# Altium PCB Carte Emulateur AX12.PcbDoc
Units mm, origin at the board's own origin, x right, y up, seen from the top; angles counter-clockwise.
Board outline 50 x 20 mm, 2 copper layers (Top Layer, Bottom Layer); 24 components, 18 nets, 92 pads, 19 vias.
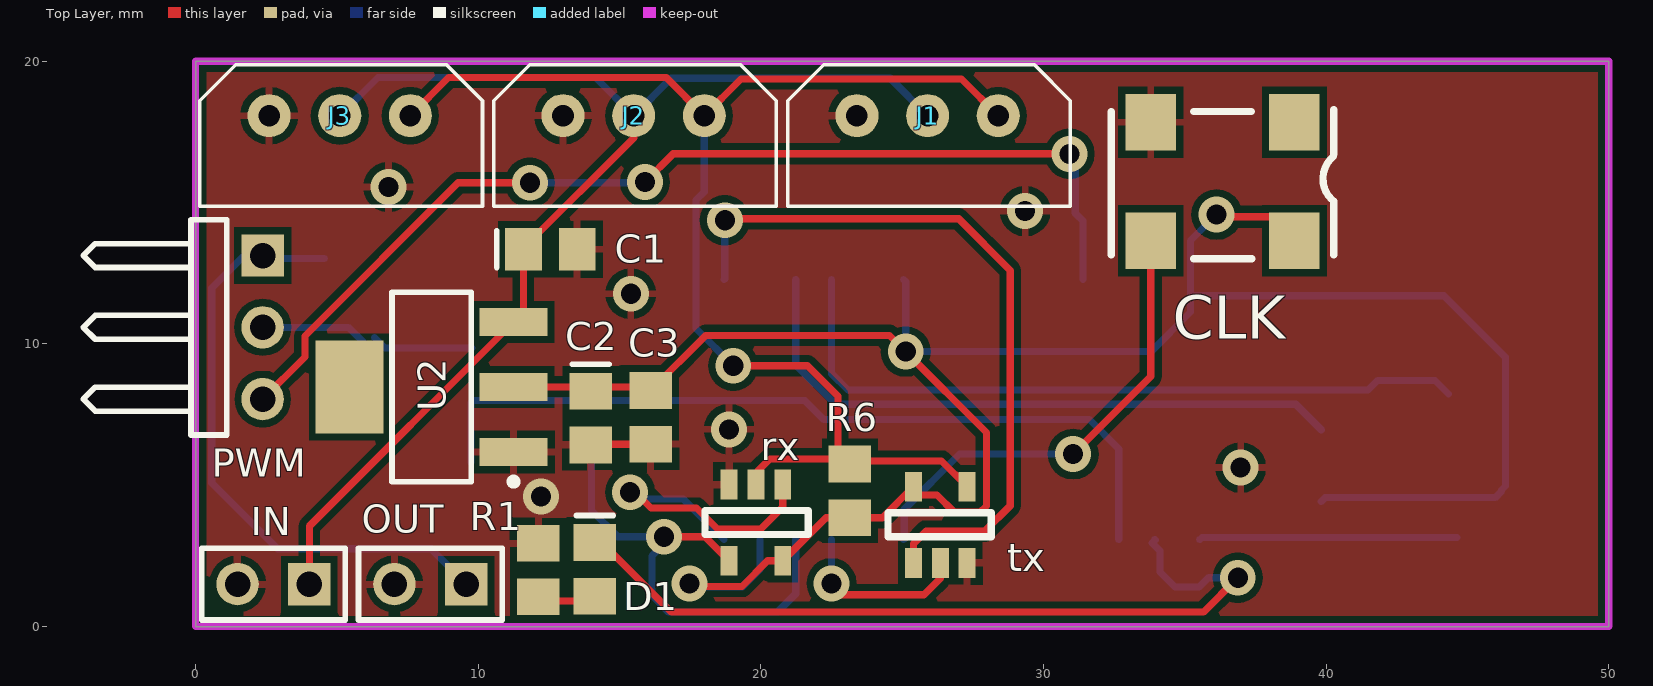
[diagram p0: Top Layer view]
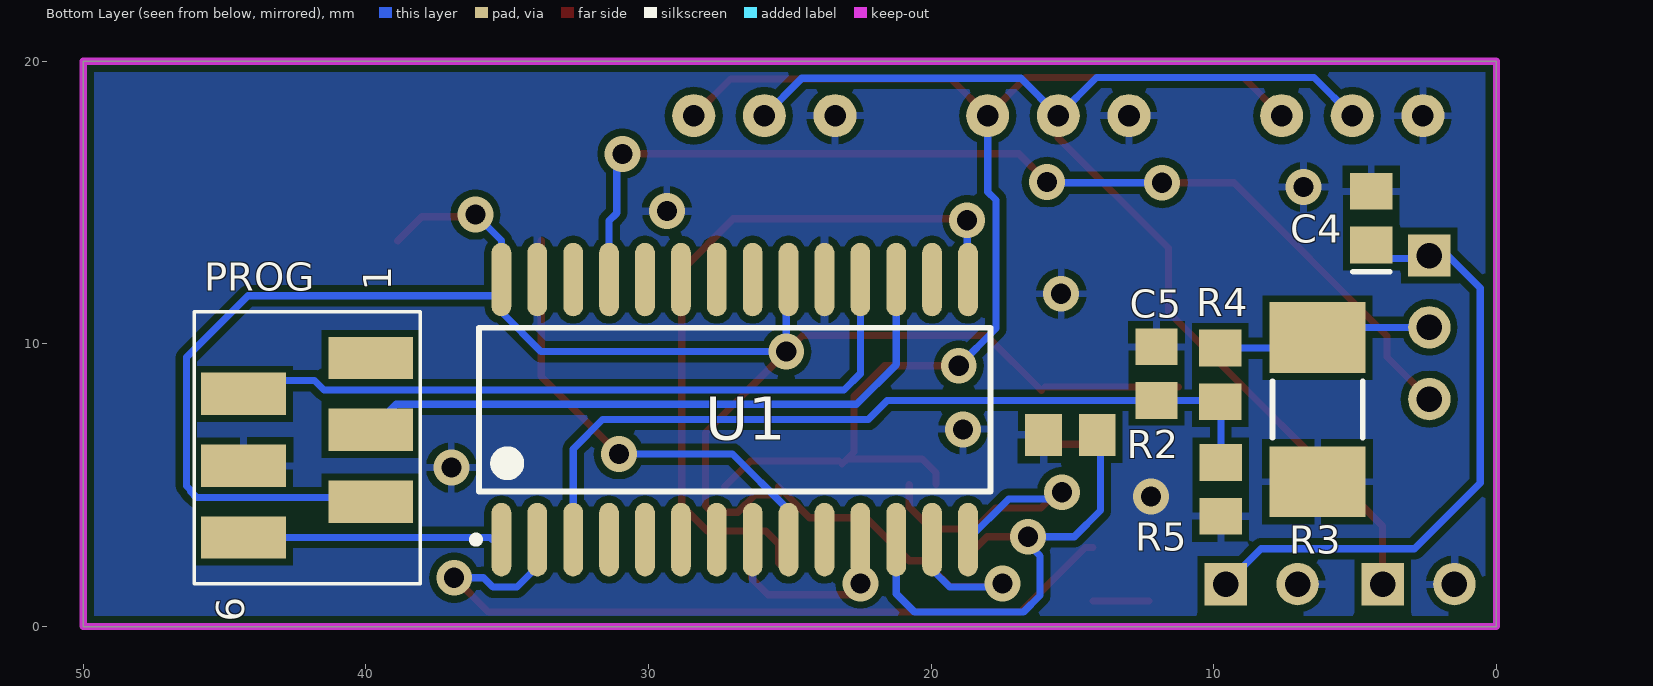
[diagram p1: Bottom Layer view, seen from below]

## Layer stack, top to bottom
Top Solder: solder mask 0.0102, Solder Resist, Dk 3.5
Top Layer: signal copper 0.0356
Dielectric 1: dielectric 0.32, FR-4, Dk 4.8
Bottom Layer: signal copper 0.0356
Bottom Solder: solder mask 0.0102, Solder Resist, Dk 3.5

## Board outline
0,0 50,0 50,20 0,20

## Design rules (kind name [scope] priority, off if disabled: settings)
Clearance [All] p1: gap=0.254
MinimumSolderMaskSliver [All] p1: minsoldermaskwidth=0.15
PolygonConnect [All] p1: connectstyle=Relief reliefconductorwidth=0.254 reliefentries=4 polygonreliefangle="90 Angle" airgapwidth=0.254
RoutingVias [All] p1: holewidth=0.711 width=1.27 viastyle="Through Hole" minholewidth=0.711 minwidth=1.27 maxholewidth=0.711 maxwidth=1.27
SilkToBoardRegionClearance [All] p1 off:
SilkToSolderMaskClearance [IsPad] p1: minsilkscreentomaskgap=0.15 clearancetoexposedcopper=TRUE
SolderMaskExpansion [All] p1: expansion=0.102
Width [All] p1: maxlimit=0.254 minlimit=0.254 preferedwidth=0.254
27 further rules are at their usual default settings.

## Components (designator, comment, footprint, x,y, rotation, side; value= is the part's Value field where it differs from the comment)
C1 "Cap Pol1" C0805 12.55,13.35 r0 top
C2 "Cap Pol1" C0805 13.975,7.375 r270 top
C3 "Cap" 0805 16.1,7.4 r90 top
C4 "Cap Pol1" C0805 4.425,14.45 r90 bottom
C5 "Cap" 0805 12.025,8.95 r270 bottom
CLK "CLOCK" IQXO-70 38.875,13.65 r180 top (schematic designator K1)
D1 "LED1" C0805 14.125,2.025 r270 top
IN "IN Regulateur" HDR1X2 4.025,1.5 r180 top (schematic designator P2)
J1 "Alim AX12" MOLEX_AX12_3 25.9,18.075 r0 top
J2 "Alim AX12" MOLEX_AX12_3 15.5,18.075 r0 top
J3 "Alim AX12" MOLEX_AX12_3 5.1,18.075 r0 top
OUT "OUT Regulateur" HDR1X2 9.575,1.5 r180 top (schematic designator P3)
PROG "Programmation" 690367280676 42.075,6.325 r90 bottom (schematic designator P1)
PWM "PWM 1" HDR1X3H 2.375,13.125 r270 top (schematic designator P4)
R1 "Res1" 0805 12.125,2 r90 top
R2 "Res1" 0805 15.075,6.775 r0 bottom
R3 "Res1" L1W-2512 6.325,7.675 r270 bottom
R4 "Res1" 0805 9.775,8.9 r90 bottom
R5 "Res1" 0805 9.75,4.85 r90 bottom
R6 "Res1" 0805 23.15,4.8 r270 top
rx "74AHC1G126D" 74AHC1G126DVBR 21.075,2.85 r180 top (schematic designator J5)
tx "74AHC1G126D" 74AHC1G126DVBR 25.1,4.425 r0 top (schematic designator J4)
U1 "DSPIC30F2010-30I/SO" SOIC-SO28_M 26.95,7.675 r90 bottom
U2 "LM1117MP-3.3" MP04A_N 8.35,8.475 r180 top

## Footprints (in the part's own frame and the unit in brackets; to place one, negate y for a bottom-side part, rotate by r counter-clockwise, add the part's x,y. Pads: shape width x height; smd on the part's side, far side on the other; paste and mask are expansions set on the pad)
74AHC1G126DVBR [mm]
  rect 0.6x1.05 smd mask+0.07: 1(0.3,-2.175) 2(1.25,-2.175) 3(2.2,-2.175) 4(2.2,0.525) 5(0.3,0.525)
  silkscreen extent -0.6,-1.25 3.05,-0.4
0805 [mm] "Chip Resistor; Body 2.0 x 1.3 mm (LxW typ)"
  rect 1.3x1.5 smd: 1(-0.95,0) 2(0.95,0)
690367280676 [mm] "without Latch, 6 pins, SMT, straight"
  rect 1.5x3 smd: 1(3.175,-2.25) 2(1.905,2.25) 3(0.635,-2.25) 4(-0.635,2.25) 5(-1.905,-2.25) 6(-3.175,2.25)
  silkscreen extent -4.81,-4 4.81,4, body extent -4.81,-5 4.81,3.5, height 5.75
C0805 [mm] "Chip Capacitor; Body 2.0 x 1.2 mm (LxW typ)"
  rect 1.3x1.5 smd: 1(-0.95,0) 2(0.95,0)
  silkscreen extent -1.9,-0.65 -1.9,0.65
HDR1X2 [mm] "Connector; Header; 2 Position"
  rect 1.5x1.5 hole 0.9: 1(0,0)
  round 1.5 hole 0.9: 2(2.54,0)
  silkscreen extent -1.27,-1.27 3.81,1.27
HDR1X3H [mm] "Connector; Header; 3 Position; Right Angle"
  rect 1.5x1.5 hole 0.9: 1(0,0)
  round 1.5 hole 0.9: 2(2.54,0) 3(5.08,0)
  silkscreen extent -1.27,-6.35 6.35,-1.27
IQXO-70 [mil]
  rect 70x79 smd: 1(0,-165) 2(200,-165) 3(200,0) 4(0,0)
  silkscreen extent -55,-182 255,25
L1W-2512 [mm] "Chip Resistor; Body 6.4 x 3.2 mm (LxW typ)"
  rect 2.5x3.4 smd: 1(-2.55,0) 2(2.55,0)
  silkscreen extent -1,-1.6 1,1.6
MOLEX_AX12_3 [mil]
  round 60 hole 30: 1(-98.43,0) 2(0,0) 3(98.43,0)
  silkscreen extent -195,-126 199,71
MP04A_N [mm] "SOT223, 4-Leads, Body 6.5x3.5mm, Pitch 2.3mm, Lead Span 7mm, IPC Medium Density"
  rect 2.4x1 smd: 1(-2.9,2.3) 2(-2.9,0) 3(-2.9,-2.3)
  rect 2.4x3.3 smd: 4(2.9,0)
  silkscreen extent -3.03,-3.35 1.4,3.47, body extent -1.85,-3.35 1.85,3.35, height 1.8
SOIC-SO28_M [mm] "SOIC, 28-Leads, Body 17.9x7.5mm, Pitch 1.27mm, IPC Low Density"
  oval 2.6x0.7 smd: 1(-4.6,8.255) 2(-4.6,6.985) 3(-4.6,5.715) 4(-4.6,4.445) 5(-4.6,3.175) 6(-4.6,1.905) 7(-4.6,0.635) 8(-4.6,-0.635) 9(-4.6,-1.905) 10(-4.6,-3.175) 11(-4.6,-4.445) 12(-4.6,-5.715) 13(-4.6,-6.985) 14(-4.6,-8.255) 15(4.6,-8.255) 16(4.6,-6.985) 17(4.6,-5.715) 18(4.6,-4.445) 19(4.6,-3.175) 20(4.6,-1.905) 21(4.6,-0.635) 22(4.6,0.635) 23(4.6,1.905) 24(4.6,3.175) 25(4.6,4.445) 26(4.6,5.715) 27(4.6,6.985) 28(4.6,8.255)
  silkscreen extent -4.72,-9.05 2.9,9.28, body extent -3.8,-9.06 3.8,9.06, height 2.65

## Part data
C1 C2 C4: "Polarized Capacitor (Radial)"
C3 C5: "Capacitor"
CLK: library part OSCILLATEUR, "Oscillateur quartz"
D1: "Typical RED GaAs LED"
IN OUT: library part "Header 2", "Header, 2-Pin"
J1 J2 J3: library part MOLEX_AX12, "Connecteur"
PROG: library part "Header 6", "Header, 6-Pin"
PWM: library part "Header 3", "Header, 3-Pin"
R1 R2 R3 R4 R5 R6: "Resistor"
U1: "High-Performance 16-bit Digital Signal Controller, 12 KB Flash, 512 Byte SRAM, 1 KB EEPROM, 28-Pin SOIC, Industrial Temperature"
U2: "800mA Low-Dropout Linear Regulator"

## Via types
v1: diameter 1.27, hole 0.711, Top Layer to Bottom Layer, 19 vias

## Nets (pads, with @x,y where several pads share a name; then routed paths per layer and width w, separated by ;. In a path a pad name is that pad's centre, name@x,y a point inside that pad or via, vN(x,y) a via of type N, cw(c..) or ccw(c..) an arc to the next point about the centre after c; other vN are vias at no path point)
GND: C1.2 C2.2 C3.1 C4.2 C5.1 CLK.2 IN.2 J1.1 J2.1 J3.1 OUT.2 PROG.4 R1.2 R2.2 R3.2 R5.1 rx.3 tx.3 U1.8 U1.19 U1.27 U2.1 | length 2.1
  Top Layer w0.254: C2.2@14,6.45 C3.1
  other v1: 12.225,4.6 36.975,5.625 18.875,6.975 15.4,11.775 29.35,14.7 6.825,15.55
NetC1_1: C1.1 IN.1 J1.2 J2.2 J3.2 U2.3 | length 44.3
  Top Layer w0.254: IN.1 4.025,3.55 U2.3 11.6,11.125 C1.1 11.6,13.389 15.5,17.289 J2.2
  Bottom Layer w0.254: J3.2 6.45,19.425 14.15,19.425 J2.2 16.825,19.4 24.575,19.4 J1.2
NetC2_1: C2.1 C3.2 CLK.4 PROG.5 R6.2 rx.5 tx.5 U1.13 U1.20 U1.28 U2.2 | length 81.8
  Top Layer w0.254: U2.2 C3.2@15.975,8.475 ; C3.2 18.05,10.3 24.55,10.3 v1(25.125,9.725) 27.981,6.869 27.981,4.267 27.758,4.044 26.842,4.044 26.236,4.65 25.4,4.65 tx.5 24.3,3.85 R6.2 22.3,3.85 rx.5 20.239,2.325 19.333,1.419 17.457,1.419 17.401,1.475 17.45,1.524 v1(17.48,1.524) ; v1(36.127,14.576) 36.202,14.5 38.025,14.5 CLK.4
  Bottom Layer w0.254: v1(17.48,1.524) 17.45,1.524 17.401,1.475 17.482,1.394 19.344,1.394 19.965,2.015 U1.13 ; U1.20 25.125,12.195 v1(25.125,9.725) 33.8,9.725 35.205,11.13 U1.28@35.205,11.7 ; v1(36.127,14.576) 35.205,13.654 U1.28 U1.28@35.205,11.7 ; PROG.5 39.964,4.559 45.983,4.559 46.206,4.782 46.206,4.831 46.35,4.975 46.35,9.525 44.175,11.7 U1.28@35.205,11.7
NetC4_1: C4.1 OUT.1 PWM.1 | length 21.9
  Bottom Layer w0.254: C4.1@4.55,13.025 2.475,13.025 PWM.1 1.725,13.125 0.575,11.975 0.575,5.075 2.9,2.75 8.325,2.75 OUT.1
NetC5_2: C5.2 R4.1 R5.2 U1.3 | length 29
  Bottom Layer w0.254: R5.2 9.75,7.925 R4.1 9.825,8 C5.2 21.55,8 22.225,7.325 31.625,7.325 32.665,6.285 U1.3
NetD1_1: D1.1 U1.2 | length 28.5
  Top Layer w0.254: D1.1@14.275,2.8 14.55,2.8 16.842,0.508 35.658,0.508 v1(36.875,1.725)
  Bottom Layer w0.254: U1.2 33.952,3.058 33.85,2.957 34.125,2.682 34.125,1.925 34.656,1.394 35.508,1.394 35.839,1.725 v1(36.875,1.725)
NetD1_2: D1.2 R1.1 | length 2
  Top Layer w0.254: R1.1@12.3,0.9 D1.2@14.275,0.9
NetJ1_3: J1.3 J2.3 J3.3 R6.1 rx.2 tx.4 | length 47.4
  Top Layer w0.254: J3.3 8.95,19.425 16.65,19.425 J2.3 19.3,19.375 27.1,19.375 J1.3 ; v1(19.025,9.225) 21.65,9.225 22.725,8.15 22.725,6.175 R6.1@22.969,5.931 ; rx.2 19.825,5.439 20.317,5.931 R6.1@22.969,5.931 ; R6.1 R6.1@22.969,5.931 ; R6.1@23.256,5.856 26.394,5.856 tx.4
  Bottom Layer w0.254: J2.3 18,15.378 17.709,15.087 17.709,10.541 v1(19.025,9.225)
NetJ4_1: tx.1 U1.15 | length 26.1
  Top Layer w0.254: v1(18.725,14.375) 18.775,14.425 27,14.425 28.825,12.6 28.825,4.275 27.925,3.375 25.85,3.375 25.4,2.925 tx.1 tx.1@25.325,2.175
  Bottom Layer w0.254: U1.15 18.725,12.305 v1(18.725,14.375)
NetJ4_2: tx.2 U1.11 | length 6.4
  Top Layer w0.254: v1(22.501,1.525) 22.501,1.475 22.851,1.125 25.775,1.125 26.35,1.7 tx.2
  Bottom Layer w0.254: v1(22.501,1.525) 22.501,3.071 U1.11
NetJ5_1: rx.1 U1.14 | length 11.5
  Top Layer w0.254: v1(15.376,4.75) 15.376,4.926 16.11,4.191 17.727,4.191 18.468,3.45 20,3.45 20.775,4.225 rx.1
  Bottom Layer w0.254: v1@15.045,4.506 17.264,4.506 U1.14
NetJ5_4: R2.1 rx.4 U1.12 | length 17.7
  Top Layer w0.254: v1(16.575,3.175) 18.025,3.175 rx.4
  Bottom Layer w0.254: R2.1@14.125,6.4 14.01,6.285 14.01,4.104 14.939,3.175 v1(16.575,3.175) 16.575,2.925 16.15,2.5 16.15,1.1 16.742,0.508 20.583,0.508 21.235,1.16 U1.12
NetK1_3: CLK.3 U1.9 | length 16.6
  Top Layer w0.254: v1(31.05,6.1) 33.795,8.845 CLK.3
  Bottom Layer w0.254: U1.9 25.075,3.105 25.075,4.149 27.026,6.1 v1(31.05,6.1)
NetP1_2: PROG.2 U1.18 | length 25.7
  Bottom Layer w0.254: U1.18 22.505,8.945 23.081,8.369 41.483,8.369 41.814,8.7 43.855,8.7 PROG.2
NetP1_3: PROG.3 U1.17 | length 22.6
  Bottom Layer w0.254: U1.17 21.235,9.265 22.639,7.861 38.924,7.861 PROG.3
NetP1_6: PROG.6 U1.1 | length 9.1
  Bottom Layer w0.254: U1.1@35.53,3.075 35.605,3.15 PROG.6@44.625,3.15
NetP4_2: PWM.2 R3.1 R4.2 | length 8
  Bottom Layer w0.254: PWM.2 5.415,10.585 R3.1@6.35,9.65 ; R3.1 6.7,9.85 R4.2
NetP4_3: PWM.3 U1.25 | length 37.2
  Top Layer w0.254: PWM.3 3.869,9.539 3.869,10.283 9.286,15.7 v1(11.825,15.7) ; v1(15.9,15.725) 16.9,16.725 v1(30.925,16.725)
  Bottom Layer w0.254: v1(11.825,15.7) 15.875,15.7 v1(15.9,15.725) ; v1(30.925,16.725) 31.125,16.525 31.125,14.625 31.395,14.355 U1.25
pads on no net: CLK.1 PROG.1 U1.4 U1.5 U1.6 U1.7 U1.10 U1.16 U1.21 U1.22 U1.23 U1.24 U1.26 U2.4

## Polygon pours and split planes (outlines as drawn)
GND on Top Layer "Top Layer-No Net" (solid, pour order 0): 0,20 0,0 50,0 50,20
GND on Bottom Layer "Top Layer-No Net" (solid, pour order 2): 0,0 0,20 50,20 50,0

## Keep-outs
Keep-Out Layer:
  the board outline again, w0.254

## Text inside footprints (layer, text, board x,y; h text height)
PROG: Bottom Overlay "6" at 44.3,0.175 h1 r270; Bottom Overlay "1" at 39.1,11.875 h1 r270